# Altium PCB FSMSequence_PCB.PcbDoc
Units mm, origin at the board's own origin, x right, y up, seen from the top; angles counter-clockwise.
Board outline 58.52 x 47.74 mm, 2 copper layers (Top Layer, Bottom Layer); 23 components, 17 nets, 89 pads, 26 vias.
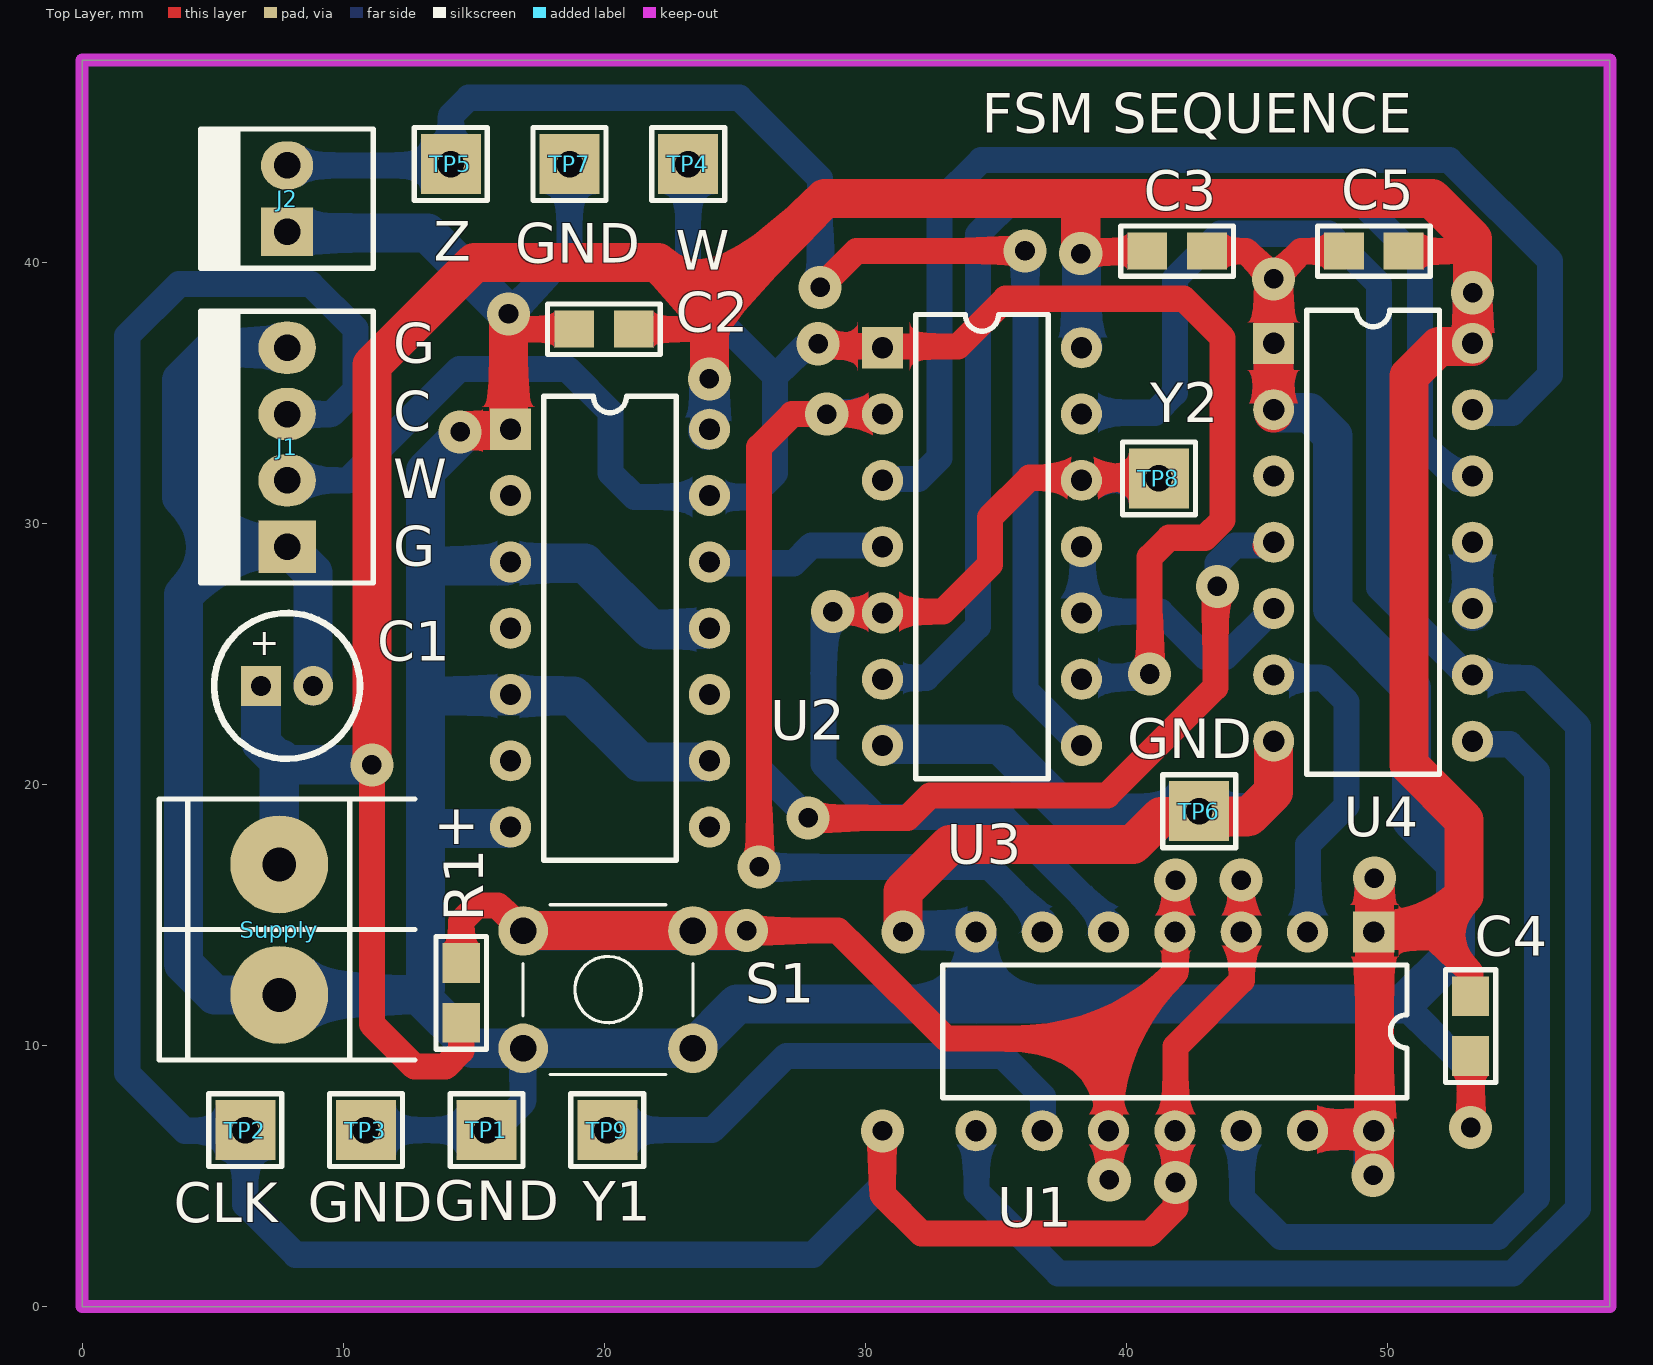
[diagram p0: Top Layer view]
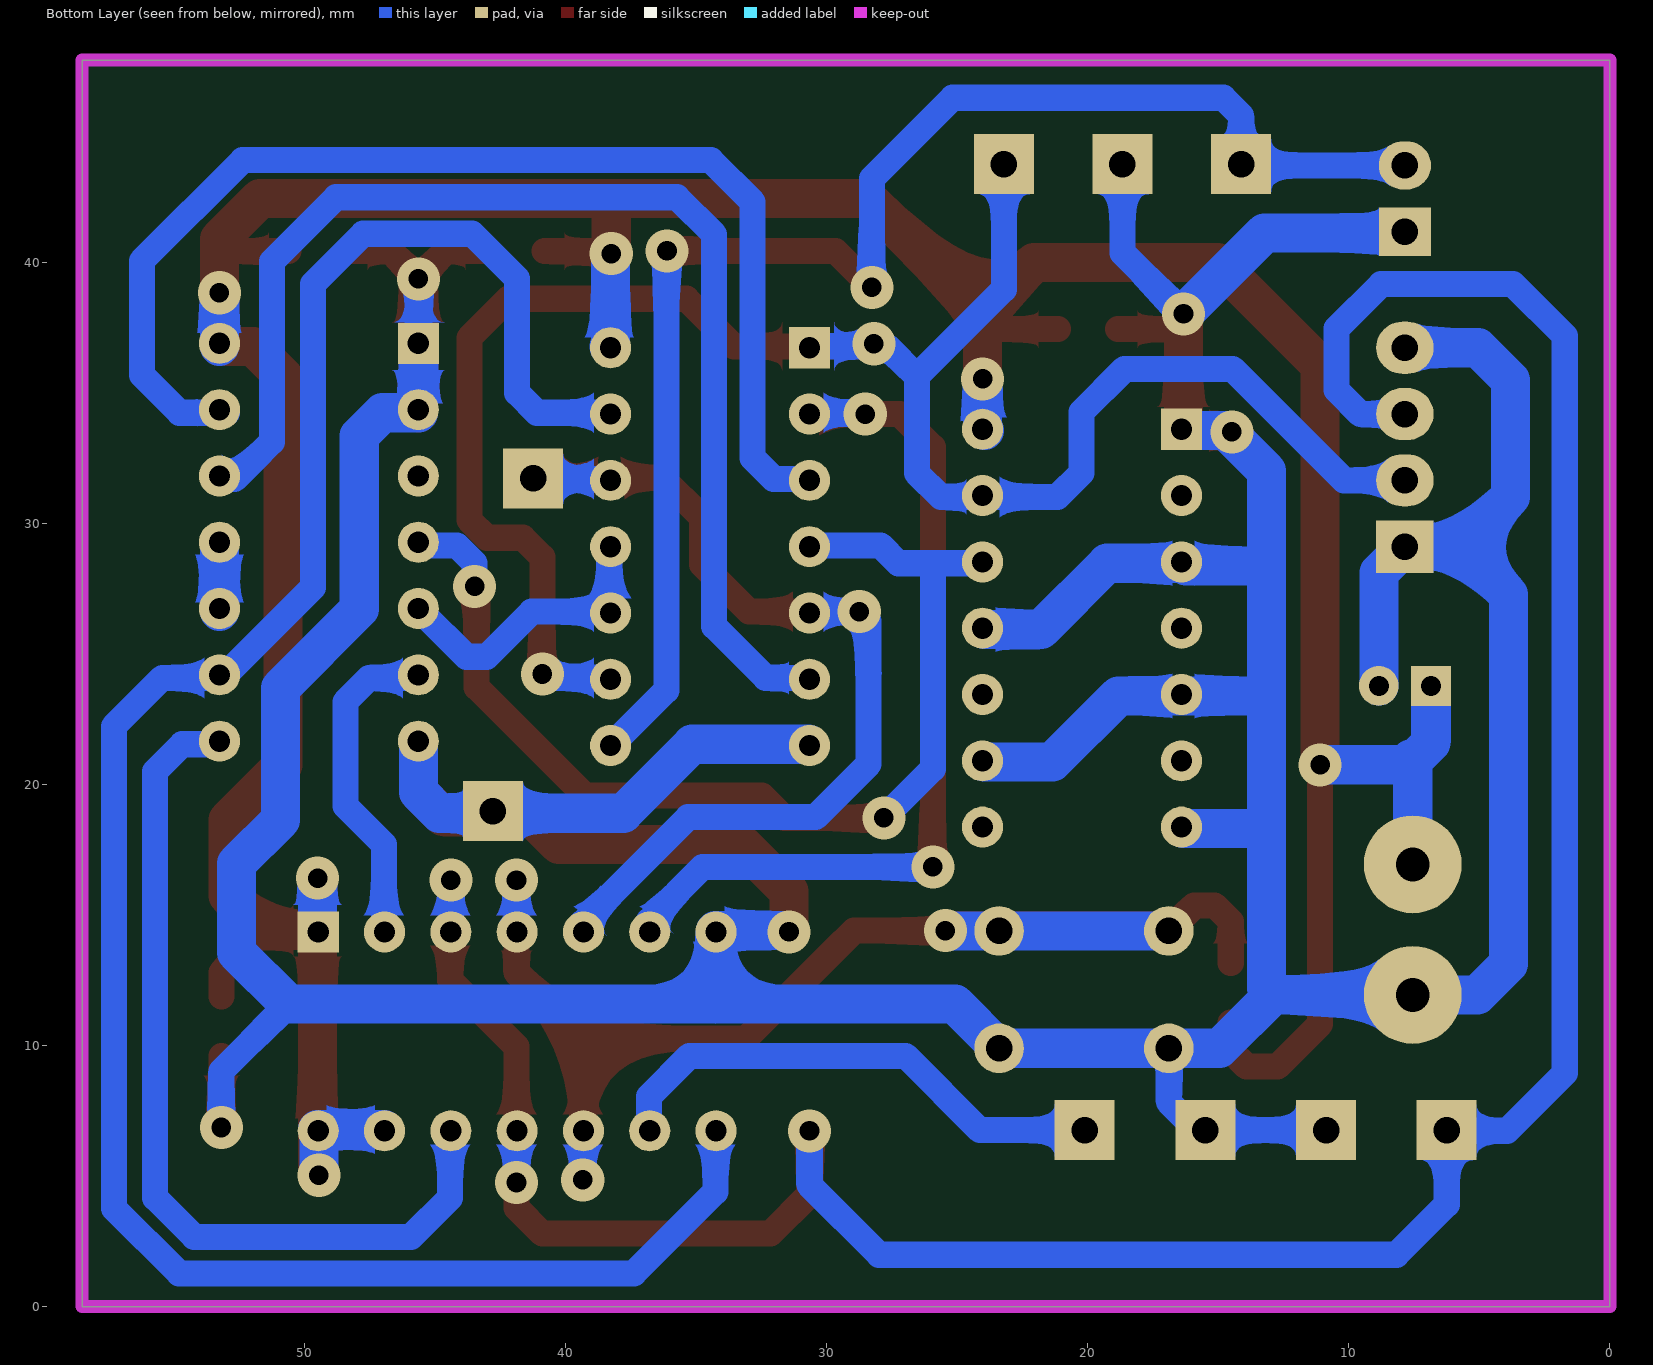
[diagram p1: Bottom Layer view, seen from below]

## Layer stack, top to bottom
Top Solder: solder mask 0.0102, Solder Resist, Dk 3.5
Top Layer: signal copper 0.0356
Dielectric 1: dielectric 0.32, FR-4, Dk 4.8
Bottom Layer: signal copper 0.0356
Bottom Solder: solder mask 0.0102, Solder Resist, Dk 3.5

## Board outline
0,0 58.522,0 58.522,47.745 0,47.745

## Design rules (kind name [scope] priority, off if disabled: settings)
Clearance [All] p1: gap=0.4
PolygonConnect [All] p1: connectstyle=Relief reliefconductorwidth=0.254 reliefentries=4 polygonreliefangle="90 Angle" airgapwidth=0.254
RoutingVias [All] p1: holewidth=0.75 width=1.65 viastyle="Through Hole" minholewidth=0.75 minwidth=1.65 maxholewidth=0.75 maxwidth=1.65
SolderMaskExpansion [All] p1: expansion=0.102
Width [All] p1: maxlimit=1.5 minlimit=0.7 preferedwidth=1
30 further rules are at their usual default settings.

## Components (designator, comment, footprint, x,y, rotation, side; value= is the part's Value field where it differs from the comment)
C1 "10uF" CAP100RP 7.849,23.774 r0 top
C2 "100nF" 0805 19.99,37.44 r180 top
C3 "100nF" 0805 41.943,40.429 r0 top
C4 "100nF" 0805 53.188,10.744 r270 top
C5 "100nF" 0805 49.479,40.429 r180 top
J1 "MOLEX4" MOLEX4 7.849,29.108 r90 top
J2 "MOLEX2" MOLEX2 7.849,41.173 r90 top
R1 "100k" 0805 14.524,12.014 r90 top
S1 "TACT SWITCH" TACTSWITCH 20.145,12.141 r90 top
Supply "5V" BORNERA2 7.549,14.438 r0 top
TP1 "GND" TPTH 15.494,6.756 r0 top
TP2 "CLK" TPTH 6.248,6.756 r0 top
TP3 "GND" TPTH 10.871,6.756 r0 top
TP4 "W" TPTH 23.216,43.764 r0 top
TP5 "Z" TPTH 14.122,43.764 r0 top
TP6 "GND" TPTH 42.791,18.974 r0 top
TP7 "GND" TPTH 18.669,43.764 r0 top
TP8 "Y2" TPTH 41.25,31.725 r0 top
TP9 "Y1" TPTH 20.117,6.756 r0 top
U1 "SN74LS74AN" DIP14 49.479,14.351 r270 top
U2 "SN74LS08J" DIP14 30.658,36.728 r0 top
U3 "SN74LS04N" DIP14 16.408,33.604 r0 top
U4 "SN74LS32N" DIP14 45.644,36.897 r0 top

## Footprints (in the part's own frame and the unit in brackets; to place one, negate y for a bottom-side part, rotate by r counter-clockwise, add the part's x,y. Pads: shape width x height; smd on the part's side, far side on the other; paste and mask are expansions set on the pad)
0805 [mil] "Pasivo 0805"
  rect 60x56 smd: 1(-45,0) 2(45,0)
  silkscreen extent -85,-38 85,38, body extent -40,-25 39,25, height 15
BORNERA2 [mm] "Bornera con Tornillos 5mm separación"
  round 3.75 hole 1.3: 1(0,2.5) 2(0,-2.5)
  silkscreen extent -4.6,-5 5.2,5, body extent -3.76,-4.89 3.94,5.61, height 10
CAP100RP [mil] "Body diameter 5mm"
  rect 60x60 hole 30: 1(-39.37,0)
  round 60 hole 30: 2(39.37,0)
  silkscreen extent -110,-110 110,110, body extent -99,-99 99,100, height 454
DIP14 [mil] "DIP; 14 Leads; Row Spacing 7.62 mm; Pitch 2.54 mm"
  rect 62x62 hole 32: 1(0,0)
  round 62 hole 32: 2(0,-100) 3(0,-200) 4(0,-300) 5(0,-400) 6(0,-500) 7(0,-600) 8(300,-600) 9(300,-500) 10(300,-400) 11(300,-300) 12(300,-200) 13(300,-100) 14(300,0)
  silkscreen extent 50,-650 250,50, body extent -5,-675 305,75, height 165
MOLEX2 [mm]
  rect 1.85x2 hole 1.016: 1(0,0)
  oval 1.85x2 hole 1.016: 2(2.54,0)
  silkscreen extent -1.4,-3.3 3.94,3.3, body extent -1.27,-3.17 3.81,3.18, height 10.74
MOLEX4 [mm]
  rect 2x2.2 hole 1.016: 1(0,0)
  oval 2x2.2 hole 1.016: 2(2.54,0) 3(5.08,0) 4(7.62,0)
  silkscreen extent -1.4,-3.3 9.02,3.3, body extent -1.27,-3.17 8.89,3.18, height 10.74
TACTSWITCH [mm]
  round 1.9 hole 1.016: 1(-2.25,-3.25) 2(-2.25,3.25) 3(2.25,-3.25) 4(2.25,3.25)
  silkscreen extent -3.25,-3.25 3.25,3.25, body extent -3.05,-3.95 3.15,3.95, height 7
TPTH [mm]
  rect 2.3x2.3 hole 1.016: 1(0,0)
  silkscreen extent -1.4,-1.4 1.4,1.4, body extent -1.27,-1.27 1.27,1.27, height 6.04

## Part data
C1: library part CAPPOL
C2 C3 C4 C5: library part CAP
R1: library part RES
Supply: library part BATERIA, "BATERIA"
TP1 TP2 TP3 TP4 TP5 TP6 TP7 TP8 TP9: library part TP
U1: "Dual D-Type Positive-Edge-Triggered Flip-Flop with Preset and Clear"
U2: "Quadruple 2-Input Positive-AND Gate"
U3: "Hex Inverter"
U4: "Quadruple 2-Input Positive-OR Gate"

## Via types
v1: diameter 1.65, hole 0.75, Top Layer to Bottom Layer, 26 vias

## Nets (pads, with @x,y where several pads share a name; then routed paths per layer and width w, separated by ;. In a path a pad name is that pad's centre, name@x,y a point inside that pad or via, vN(x,y) a via of type N, cw(c..) or ccw(c..) an arc to the next point about the centre after c; other vN are vias at no path point)
CLK: J1.3 TP2.1 U1.3 U1.11 | length 112.8
  Top Layer w1: v1(30.658,6.731) 30.658,4.293 32.156,2.794 40.894,2.794 41.885,3.785 v1(41.885,4.75) 41.885,9.957 44.425,12.497 44.425,14.402 44.45,14.427 44.399,14.478 v1(44.399,16.332)
  Bottom Layer w1: J1.3 9.55,34.188 10.465,35.103 10.465,37.465 8.763,39.167 3.708,39.167 1.727,37.186 1.727,8.941 3.937,6.731 6.248,6.731 6.248,3.912 8.179,1.981 27.991,1.981 30.658,4.648 v1(30.658,6.731) ; v1(41.885,4.75) U1.11@41.885,6.782 ; v1(44.399,16.332) 44.399,14.478 44.45,14.427 U1.3@44.425,14.402
GND: C1.2 C2.2 C3.2 C4.2 C5.2 J1.1 J1.4 J2.1 S1.1 S1.2 Supply.2 TP1.1 TP3.1 TP6.1 TP7.1 U1.7 U2.7 U3.1 U3.3 U3.5 U3.7 U3.9 U3.11 U4.1 U4.2 U4.7 | length 265
  Top Layer w1: v1(16.332,38.024) 16.916,37.44 C2.2 ; C3.2 44.585,40.429 v1(45.644,39.37) 46.702,40.429 C5.2 ; v1(53.188,6.858) C4.2
  Top Layer w1.5: v1(14.478,33.503) 14.529,33.553 16.332,33.553 v1(16.332,38.024) ; v1(31.445,14.351) 31.445,15.9 33.249,17.704 40.259,17.704 41.326,18.771 44.704,18.771 45.644,19.71 U4.7@45.644,21.539 ; U4.2@45.644,34.239 U4.2 U4.1 v1(45.644,39.37)
  Bottom Layer w1: TP3.1 TP1.1 15.824,6.756 16.895,7.827 S1.2 ; v1(16.332,38.024) 18.669,40.361 TP7.1 ; U4.1@45.644,36.779 U4.1 v1(45.644,39.37) ; 50.622,11.582 53.188,9.017 v1(53.188,6.858)
  Bottom Layer w1.5: J1.4 5.055,36.728 3.81,35.484 3.81,31.013 5.715,29.108 ; J2.1 7.899,41.123 13.233,41.123 v1(16.332,38.024) ; C1.2 8.849,28.108 J1.1 5.715,29.108 ; 13.157,12.192 13.157,18.517 ; U3.7@16.332,18.313 13.36,18.313 13.157,18.517 ; U3.1@16.332,33.553 14.707,33.553 13.157,32.004 13.157,28.372 ; U3.9@23.952,20.853 21.361,20.853 18.821,23.393 13.31,23.393 13.157,23.546 ; U3.11@23.952,25.933 21.793,25.933 19.253,28.473 16.332,28.473 16.231,28.372 13.157,28.372 ; U2.7@30.709,21.539 35.154,21.539 37.795,18.898 44.831,18.898 45.644,19.71 U4.7@45.644,21.539 ; v1(31.445,14.351) 31.496,14.402 34.265,14.402 34.265,11.582 ; U4.1@45.644,36.779 U4.2 45.644,34.239 47.015,34.239 47.904,33.35 47.904,26.721 50.927,23.698 50.927,18.644 52.603,16.967 52.603,13.564 50.622,11.582 34.265,11.582 ; 5.715,29.108 3.886,27.28 3.886,13.132 5.08,11.938 Supply.2 12.903,11.938 14.95,9.891 S1.2 S1.1 25.086,11.582 34.265,11.582 ; 13.157,18.517 13.157,23.546 ; 13.157,23.546 13.157,28.372
NetU2_3: U2.3 U4.13 | length 46.1
  Bottom Layer w1: U2.3@30.709,31.699 32.029,31.699 32.842,32.512 32.842,42.316 34.442,43.917 52.375,43.917 56.236,40.056 56.236,35.687 54.788,34.239 U4.13@52.984,34.239
NetU2_6: U2.6 U4.12 | length 47.5
  Bottom Layer w1: U2.6@30.709,24.079 32.334,24.079 34.315,26.06 34.315,41.073 35.737,42.495 48.793,42.495 51.257,40.03 51.257,33.122 52.68,31.699 U4.12@53.264,31.699
NetU4_10: U4.10 U4.11 | length 2.5
  Bottom Layer w1.5: U4.10@53.264,26.619 U4.10 U4.11@53.264,29.159
NEXT_Y1: U1.12 U4.8 | length 34.4
  Bottom Layer w1: U1.12@44.425,6.782 44.425,4.166 45.923,2.667 54.229,2.667 55.728,4.166 55.728,20.498 54.686,21.539 U4.8@53.264,21.539
NEXT_Y2: U1.2 U4.6 | length 12.5
  Bottom Layer w1: U4.6@45.644,24.079 47.523,24.079 48.438,23.165 48.438,19.177 46.965,17.704 U1.2@46.965,14.402
RESET: R1.2 S1.3 S1.4 U1.4 U1.10 | length 53.9
  Top Layer w1: R1.2 14.524,14.752 15.138,15.367 15.919,15.367 S1.4 ; v1(25.451,14.402) 28.956,14.402 29.72,13.638 ; 29.72,13.636 33.095,10.262 39.345,10.262 ; v1(39.345,4.851) 39.345,10.262 ; v1(41.885,16.332) 41.885,12.802 39.345,10.262
  Top Layer w1.5: S1.4 16.905,14.402 v1(25.451,14.402)
  Bottom Layer w1: v1(39.345,4.851) U1.10@39.345,6.782 ; U1.4@41.885,14.402 42.062,14.58 41.885,14.757 v1(41.885,16.332)
  Bottom Layer w1.5: S1.4 S1.3 25.44,14.391 v1(25.451,14.402)
SIGNAL: U2.10 U2.11 U4.5 | length 11.3
  Bottom Layer w1: U2.11@38.329,29.159 38.329,26.619 41.3,26.619 43.028,24.892 43.801,24.892 45.528,26.619 U4.5@45.644,26.619
VCC: C1.1 C2.1 C3.1 C4.1 C5.1 R1.1 Supply.1 U1.1 U1.13 U1.14 U2.14 U3.14 U4.14 | length 164.5
  Top Layer w1: v1(11.1,20.752) 11.1,10.82 12.725,9.195 13.919,9.195 14.524,9.799 R1.1 ; C2.1 23.774,37.44 24.028,37.186 ; v1(38.252,40.335) 38.346,40.429 C3.1 ; C5.1 52.866,40.429 53.264,40.03 ; 51.587,14.402 53.188,12.802 C4.1
  Top Layer w1.5: v1(11.1,20.752) 11.1,36.068 15.031,39.999 22.053,39.999 24.028,38.024 ; v1(24.028,35.535) 24.028,37.186 24.028,38.024 ; v1(38.252,40.335) 38.252,42.443 ; U1.13@46.965,6.782 U1.14@49.505,6.782 ; v1(49.454,5.029) 49.505,5.08 U1.14@49.505,6.782 ; v1(49.505,16.408) U1.1@49.505,14.402 ; 24.028,38.024 28.448,42.443 38.252,42.443 ; 38.252,42.443 51.714,42.443 53.264,40.894 53.264,40.03 v1(53.264,38.837) U4.14 53.264,36.779 51.968,36.779 50.825,35.636 50.825,20.752 52.934,18.644 52.934,15.748 51.587,14.402 U1.1@49.505,14.402 ; U1.14@49.505,6.782 U1.1@49.505,14.402
  Bottom Layer w1.5: C1.1 6.849,21.599 7.549,20.899 ; Supply.1 7.549,20.899 ; v1(11.1,20.752) 7.858,20.752 7.63,20.98 7.549,20.899 ; U3.14@23.952,33.553 24.028,33.63 v1(24.028,35.535) ; v1(38.252,40.335) 38.278,40.31 38.278,36.83 U2.14@38.329,36.779 ; U1.13@46.965,6.782 49.505,6.782 49.454,6.731 v1(49.454,5.029) ; U1.1@49.505,14.351 v1(49.505,16.408) ; U4.14@53.264,36.779 U4.14 v1(53.264,38.837)
W: J1.2 TP4.1 U2.1 U2.9 U3.13 | length 76.5
  Top Layer w1: v1(28.194,36.881) 28.194,36.779 33.553,36.779 35.378,38.604 42.193,38.604 43.688,37.109 43.688,30.124 43.015,29.451 41.643,29.451 40.894,28.702 v1(40.894,24.232)
  Bottom Layer w1: J1.2 10.184,31.648 14.451,35.916 18.593,35.916 20.244,34.265 20.244,31.928 21.158,31.013 25.629,31.013 26.543,31.928 26.543,35.636 ; TP4.1 23.216,38.964 26.543,35.636 ; U2.1@30.709,36.779 27.686,36.779 26.543,35.636 ; U2.9@38.329,24.079 40.742,24.079 v1(40.894,24.232)
Y1: TP9.1 U1.9 | length 19.8
  Bottom Layer w1: TP9.1 24.13,6.756 26.975,9.601 35.255,9.601 36.805,8.052 U1.9@36.805,6.782
Y2: TP8.1 U1.5 U2.5 U2.12 | length 38.8
  Top Layer w1: v1(28.753,26.619) 32.969,26.619 34.773,28.423 34.773,30.226 36.297,31.75 TP8.1@40.411,31.75
  Bottom Layer w1: U2.5@30.709,26.619 v1(28.753,26.619) 28.397,26.264 28.397,20.777 30.429,18.745 35.306,18.745 39.345,14.707 U1.5@39.345,14.402 ; U2.12@38.329,31.699 40.462,31.699 TP8.1@40.411,31.75
Z: J2.2 TP5.1 U2.8 | length 56.4
  Top Layer w1: v1(28.27,39.04) 29.667,40.437 v1(36.119,40.437)
  Bottom Layer w1: J2.2 14.072,43.713 TP5.1 14.122,45.618 14.808,46.304 25.171,46.304 28.27,43.205 v1(28.27,39.04) ; v1(36.119,40.437) 36.144,40.462 36.144,23.608 38.213,21.539 U2.8@38.329,21.539
~W: U2.4 U3.12 U4.4 | length 42.8
  Top Layer w1: v1(27.813,18.72) 31.623,18.72 32.487,19.583 39.268,19.583 43.409,23.724 43.409,27.381 v1@43.561,27.534 ; U4.4@45.339,29.159 U4.4@45.644,29.159
  Bottom Layer w0.7: U4.4@45.377,29.159 U4.4@45.644,29.159
  Bottom Layer w1: U3.12@23.952,28.473 25.933,28.473 ; v1(27.813,18.72) 25.933,20.599 25.933,28.473 ; U2.4@30.709,29.159 27.94,29.159 27.254,28.473 25.933,28.473 ; v1(43.485,27.584) 43.485,28.473 44.171,29.159 U4.4@45.377,29.159
~Y1: U1.8 U2.13 U4.9 | length 85.2
  Bottom Layer w1: U1.8@34.265,6.782 34.265,4.394 37.392,1.267 54.809,1.267 57.305,3.764 57.305,22.222 55.448,24.079 53.148,24.079 49.682,27.545 49.682,39.167 47.754,41.095 43.584,41.095 41.859,39.37 41.859,35.001 41.097,34.239 U2.13@38.329,34.239
~Y2: U1.6 U2.2 | length 35.7
  Top Layer w1: v1(25.933,16.84) 25.933,32.918 27.203,34.188 v1(28.524,34.188) U2.2 U2.2@30.709,34.239
  Bottom Layer w1: v1(25.933,16.84) 34.747,16.84 36.805,14.783 U1.6@36.805,14.402 ; v1(28.524,34.188) 28.575,34.239 U2.2@30.709,34.239
pads on no net: U3.2 U3.4 U3.6 U3.8 U3.10 U4.3

## Keep-outs
Keep-Out Layer:
  the board outline again, w0.5

## Silkscreen, mask and mechanical layers (free items; w line width, h text height)
Top Overlay:
  text "FSM SEQUENCE" at 34.468,44.958 h1.52
  text "G" at 11.913,36.144 h1.52
  text "C" at 11.913,33.553 h1.52
  text "W" at 11.913,30.963 h1.52
  text "G" at 11.913,28.372 h1.52
  text "+" at 13.462,17.704 h1.52

## Text inside footprints (layer, text, board x,y; h text height)
C1: Top Overlay "+" at 6.401,24.943 h1.02